# Altium PCB demo_board.PcbDoc (part 1 of 2)
Units mm, origin at the board's own origin, x right, y up, seen from the top; angles counter-clockwise.
Board outline 152.4 x 101.6 mm, 4 copper layers (L1, L2, L3, L4), stack 1.641 mm thick; 94 components, 72 nets, 715 pads, 204 vias.
Unrouted connection lines stored in the file: 201.
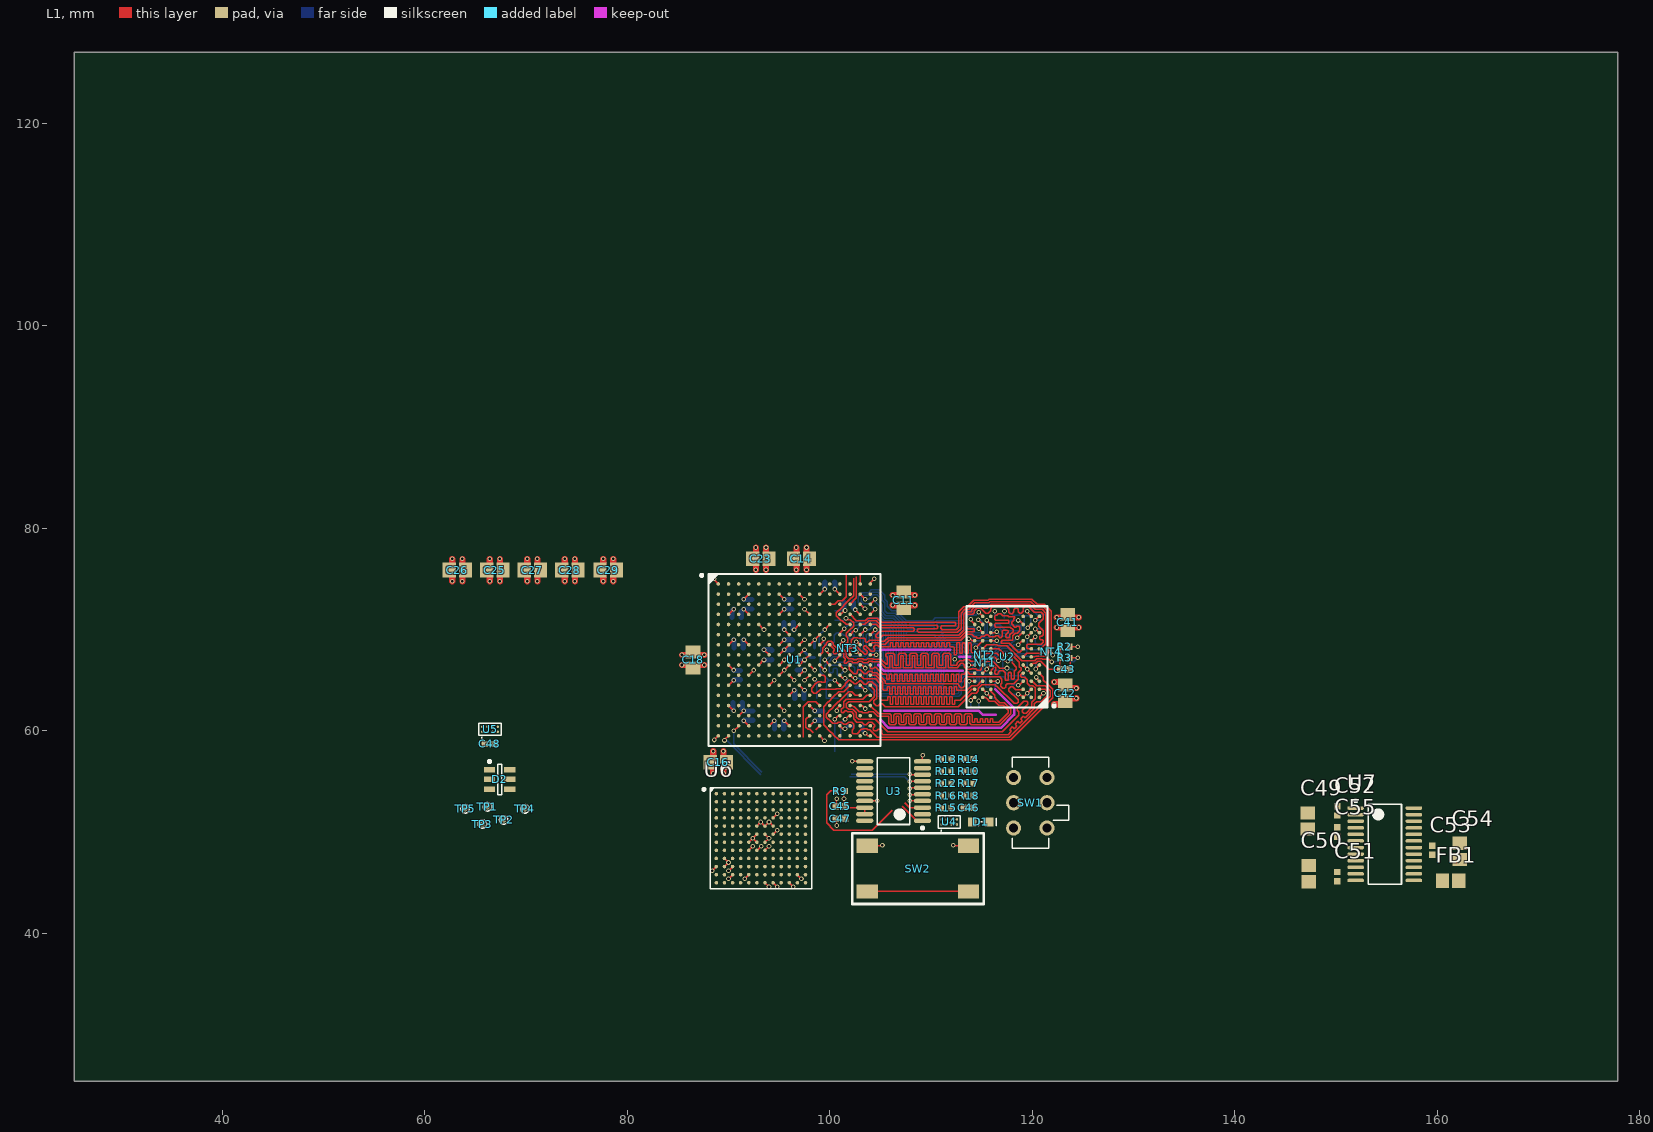
[diagram p0: L1 view]
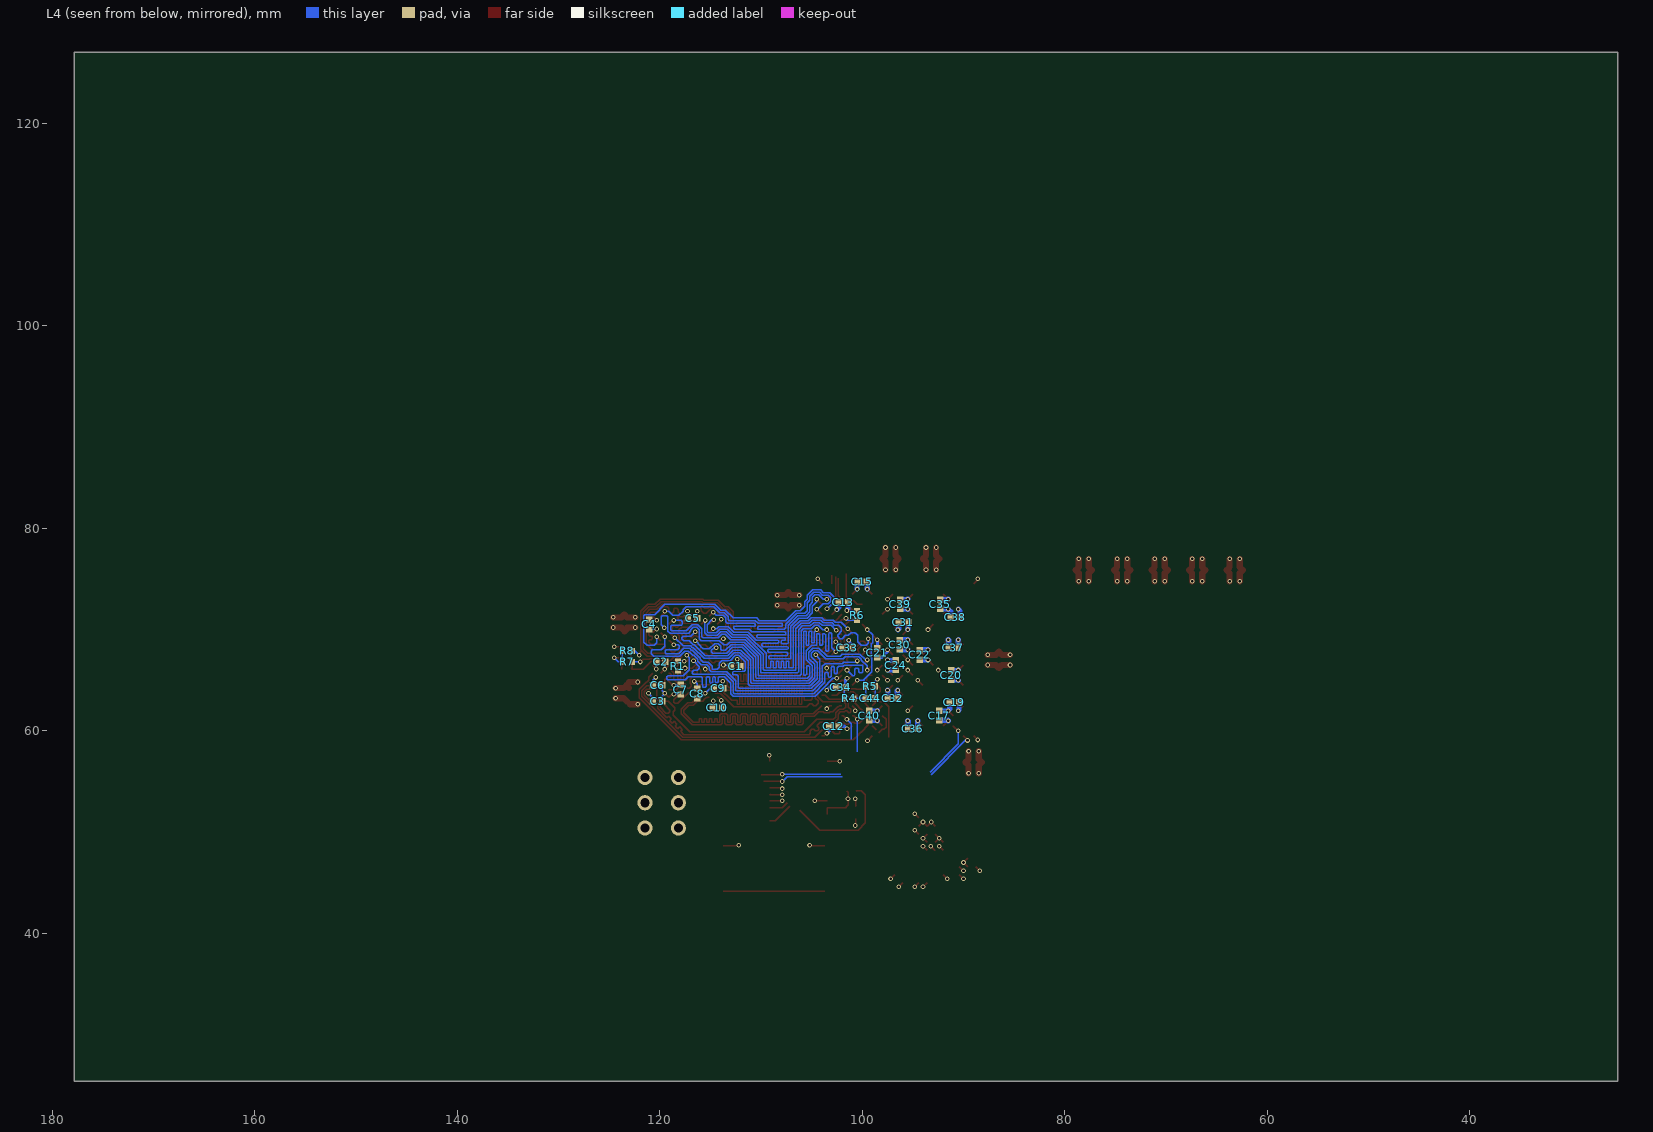
[diagram p1: L4 view, seen from below]
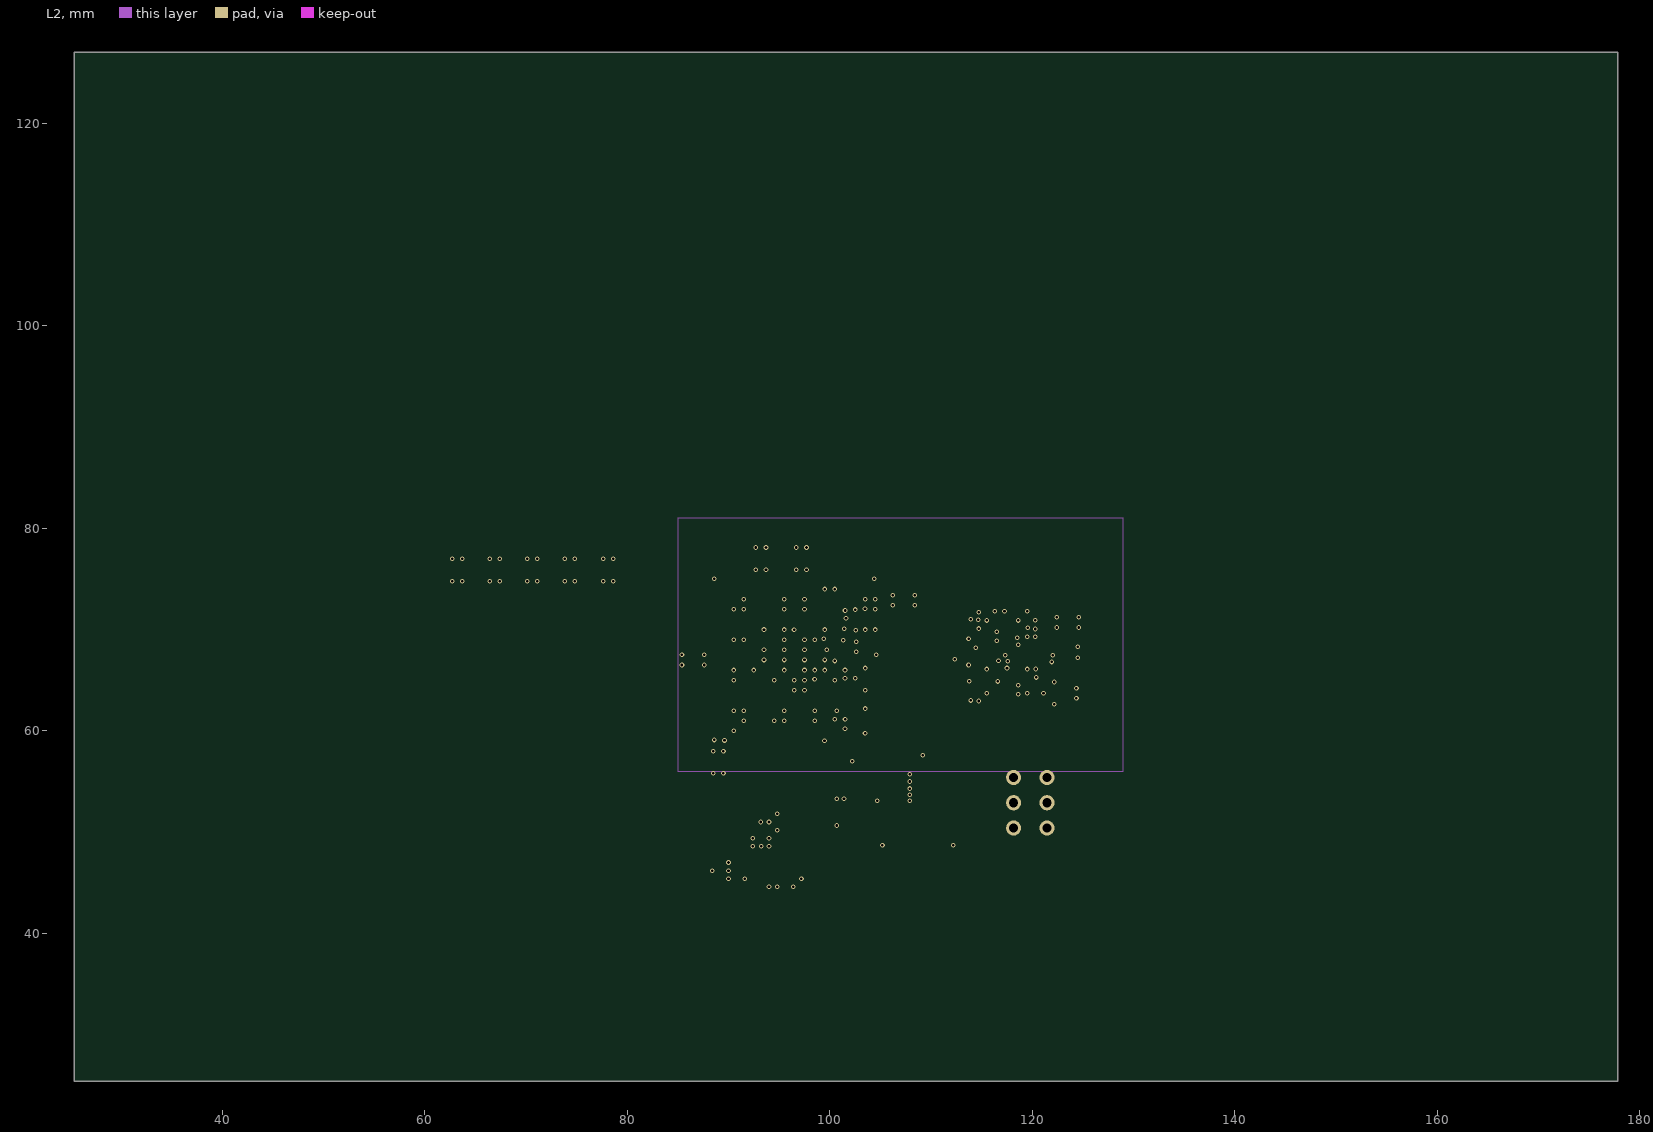
[diagram p2: L2]
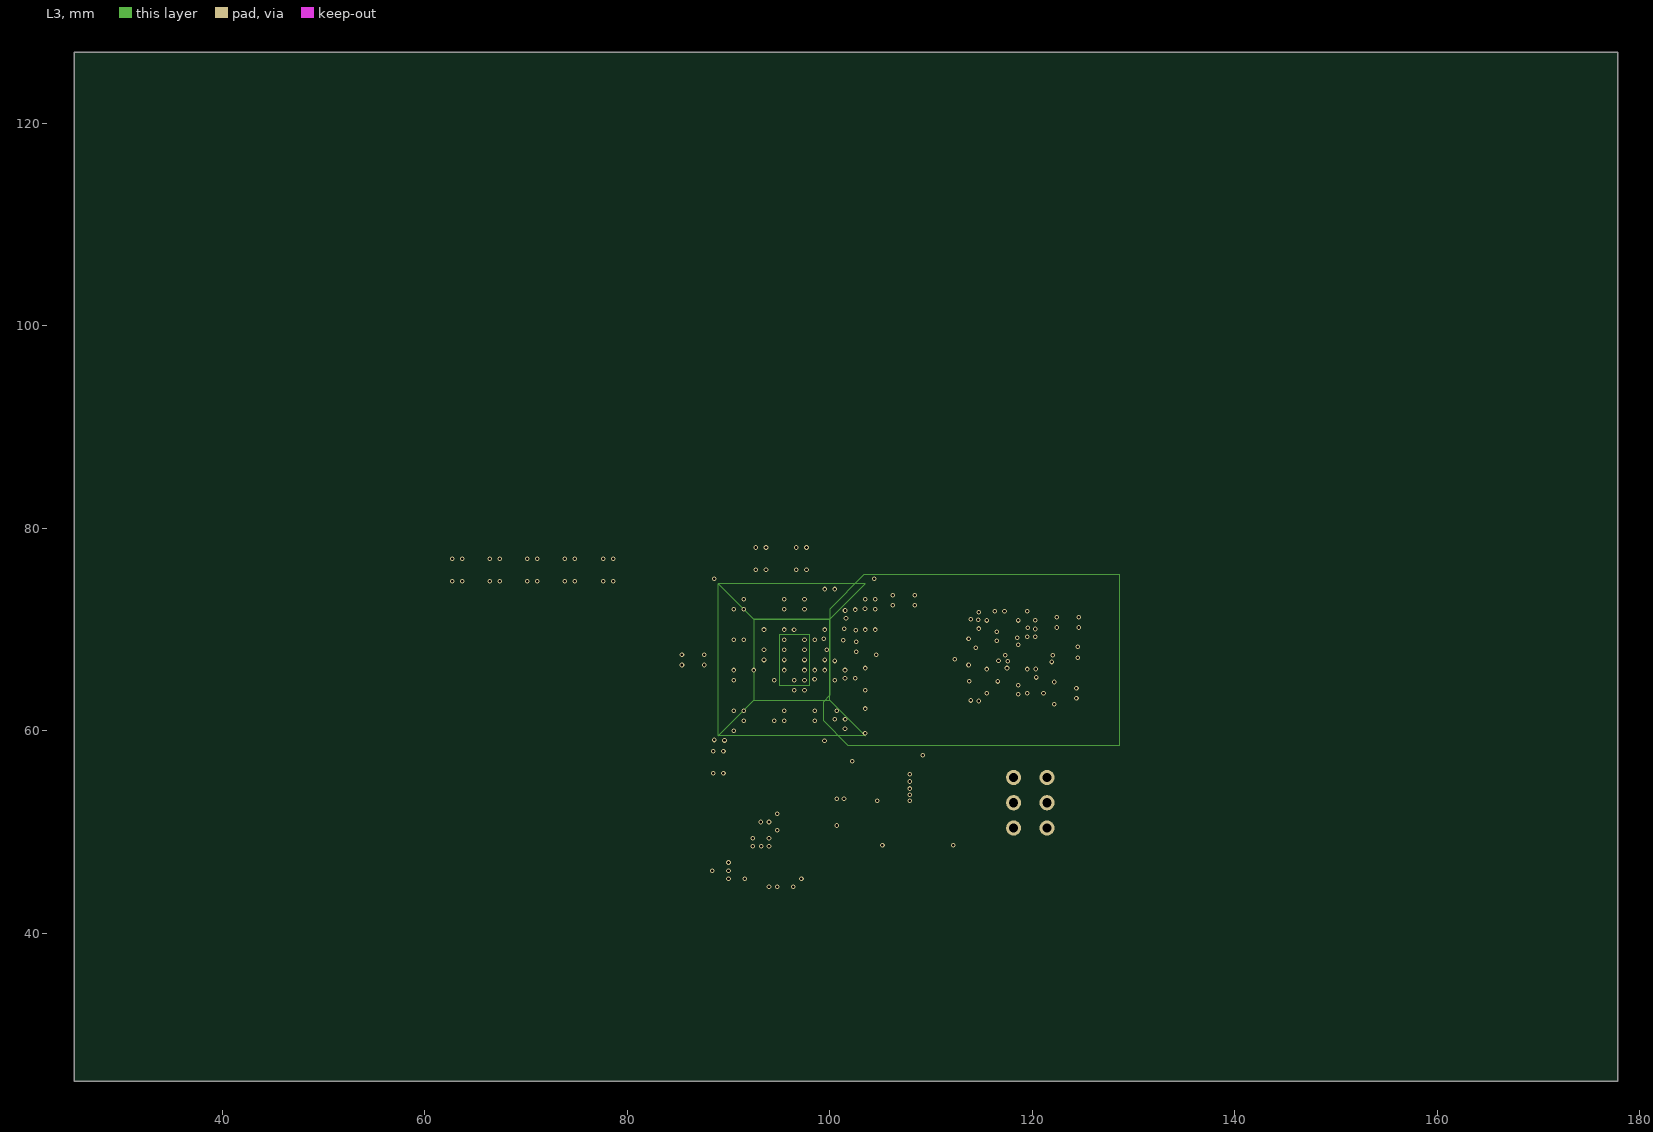
[diagram p3: L3]

## Layer stack, top to bottom
L1: signal copper 0.0356
Dielectric: prepreg 0.1702, FR-408, Dk 3.66
L2: signal copper 0.0178
Dielectric: core 1.1938, FR-408, Dk 3.66
L3: signal copper 0.0178
Dielectric: prepreg 0.1702, FR-408, Dk 3.66
L4: signal copper 0.0356

## Board outline
25.4,25.4 177.8,25.4 177.8,127 25.4,127

## Design rules (kind name [scope] priority, off if disabled: settings)
Clearance [All] p1: gap=0.127
DiffPairsRouting [All] p1: maxlimit=0.254 minlimit=0.127 mostfreqgap=0.127 maxuncoupledlength=12.7
HoleSize [All] p1: absolutevalues=TRUE maxlimit=2.54 minlimit=0.254 maxpercent=80.000 minpercent=20.000
Length DDRT [(InNetClass('DDR_D') OR InNetClass('DDR_O'))] p1: maxlimit=32.639 minlimit=32.385
Length DDRB [(InNetClass('DDR_A') OR InNetClass('DDR_O_B'))] p2: maxlimit=29.464 minlimit=29.21
MinimumAnnularRing [All] p1: minimumring=0.102
PlaneClearance [All] p1: clearance=0.254
PlaneConnect PlaneConnect_via [IsVia] p1: planeconnectstyle=Direct reliefexpansion=0.508 reliefentries=4 reliefconductorwidth=0.254 reliefairgap=0.254
PlaneConnect [All] p2: planeconnectstyle=Relief reliefexpansion=0.508 reliefentries=4 reliefconductorwidth=0.254 reliefairgap=0.254
PolygonConnect PolygonConnect_via [All vs IsVia] p1: connectstyle=Direct reliefconductorwidth=0.254 reliefentries=4 polygonreliefangle="90 Angle"
PolygonConnect [All] p2: connectstyle=Relief reliefconductorwidth=0.254 reliefentries=4 polygonreliefangle="90 Angle"
RoutingVias [All] p1: holewidth=0.254 width=0.813 viastyle="Through Hole" minholewidth=0.254 minwidth=0.457 maxholewidth=1.27 maxwidth=2.54
SilkscreenOverComponentPads SilkToSolderMaskClearance [IsPad] p1: minsilkscreentomaskgap=0.152
SolderMaskExpansion [All] p1: expansion=0.102
Width [All] p1: maxlimit=2.54 minlimit=0.127 preferedwidth=0.508
23 further rules are at their usual default settings.

## Classes and differential pairs
component class Power: C21 C22 C23 C24 C25 C26 C27 C28 C29 C30 C31 C32
component class Bank3: C18 C19 C20 C37 C38
component class Bank2_Configuration: C16 C17 C36 C40 C45 C46 C47 C48 D1 D2 R9 R10 R11 R12 R13 R14 R15 R16 R17 R18 SW1 SW2 TP1 TP2 TP3 TP4 TP5 U3 U4 U5
component class Bank1_DDR: C1 C2 C3 C4 C5 C6 C7 C8 C9 C10 C11 C12 C13 C33 C34 C41 C42 C43 C44 NT1 NT2 NT3 NT4 R1 R2 R3 R4 R5 R6 R7 R8 U2
component class Bank0: C14 C15 C35 C39 U1
component class Processor: U6
net class JTAG: TCK TCK_IN TDI_1 TDI_2 TDO TMS TMS_IN
net class FPGA_Conf: FPGA_CCLK FPGA_DIN FPGA_DONE FPGA_INIT_B FPGA_PROG_B P_FPGA_CCLK P_FPGA_DIN
net class DDR_O_B: CAS# RAS#
net class DDR_A: A0 A1 A2 A3 A4 A5 A6 A7 A8 A9 A10 A11 A12 A13
net class DDR_D: DQ0 DQ1 DQ2 DQ3 DQ4 DQ5 DQ6 DQ7
net class DDR_O: BA0 BA1 BA2 CK_N CK_P CKE DM/RDQS DQS_N DQS_P NetU2_A2 ODT WE#
net class Power: +3V3 GND MVDD VAUX VDD0 VDD3 VDDCORE VINT
component class ADC_channel: C49 C50 C51 C52 C53 C54 C55 FB1 U7
differential pair DQS: +DQS_P -DQS_N
differential pair CK: +CK_P -CK_N

## Components (designator, comment, footprint, x,y, rotation, side; value= is the part's Value field where it differs from the comment)
C1 "220n/6V3" C0402_N 112.5,66.375 r0 bottom
C2 "220n/6V3" C0402_N 119.9,66.8 r0 bottom
C3 "220n/6V3" C0402_N 120.2,62.9 r0 bottom
C4 "220n/6V3" C0402_N 121.05,70.5 r90 bottom
C5 "220n/6V3" C0402_N 116.75,71.1 r180 bottom
C6 "220n/6V3" C0402_N 120.2,64.5 r0 bottom
C7 "220n/6V3" C0402_N 117.9,64.075 r90 bottom
C8 "220n/6V3" C0402_N 116.275,63.675 r90 bottom
C9 "220n/6V3" C0402_N 114.2,64.2 r180 bottom
C10 "220n/6V3" C0402_N 114.3,62.3 r180 bottom
C11 "4u7/6V3" C0805_N 107.3,72.9 r270 top
C12 "220n/6V3" C0402_N 102.794,60.452 r180 bottom
C13 "220n/6V3" C0402_N 101.85,72.7 r0 bottom
C14 "4u7/6V3" C0805_N 97.2,77 r0 top
C15 "220n/6V3" C0402_N 100,74.7 r0 bottom
C16 "4u7/6V3" C0805_N 89,56.9 r0 top
C17 "220n/6V3" C0402_N 92.4,61.5 r270 bottom
C18 "4u7/6V3" C0805_N 86.5,67 r90 top
C19 "220n/6V3" C0402_N 90.9,62.8 r180 bottom
C20 "220n/6V3" C0402_N 91.2,65.5 r90 bottom
C21 "220n/6V3" C0402_N 98.5,67.7 r90 bottom
C22 "220n/6V3" C0402_N 94.3,67.5 r90 bottom
C23 "4u7/6V3" C0805_N 93.2,77 r0 top
C24 "220n/6V3" C0402_N 96.7,66.5 r90 bottom
C25 "4u7/6V3" C0805_N 66.925,75.875 r0 top
C26 "4u7/6V3" C0805_N 63.225,75.875 r0 top
C27 "4u7/6V3" C0805_N 70.625,75.875 r0 top
C28 "4u7/6V3" C0805_N 74.325,75.875 r0 top
C29 "4u7/6V3" C0805_N 78.125,75.875 r0 top
C30 "220n/6V3" C0402_N 96.3,68.5 r90 bottom
C31 "220n/6V3" C0402_N 95.936,70.714 r180 bottom
C32 "220n/6V3" C0402_N 97,63.2 r0 bottom
C33 "220n/6V3" C0402_N 101.473,68.224 r180 bottom
C34 "220n/6V3" C0402_N 102.1,64.3 r180 bottom
C35 "220n/6V3" C0402_N 92.3,72.5 r90 bottom
C36 "220n/6V3" C0402_N 95,60.2 r0 bottom
C37 "220n/6V3" C0402_N 91,68.2 r0 bottom
C38 "220n/6V3" C0402_N 90.8,71.2 r180 bottom
C39 "220n/6V3" C0402_N 96.241,72.492 r270 bottom
C40 "220n/6V3" C0402_N 99.3,61.5 r90 bottom
C41 "4u7/6V3" C0805_N 123.5,70.7 r270 top
C42 "4u7/6V3" C0805_N 123.254,63.722 r90 top
C43 "220n/6V3" C0402_N 123.2,66.1 r180 top
C44 "220n/6V3" C0402_N 99.2,63.2 r0 bottom
C45 "220n/6V3" C0402_N 101.05,52.55 r0 top
C46 "220n/6V3" C0402_N 113.7,52.4 r180 top
C47 "220n/6V3" C0402_N 101.05,51.3 r0 top
C48 "220n/6V3" C0402_N 66.4,58.7 r180 top
C49 "4u7/6V3" C0805_N 147.2,51.1 r90 top
C50 "4u7/6V3" C0805_N 147.3,45.9 r270 top
C51 "220n/6V3" C0402_N 150.1,45.6 r270 top
C52 "220n/6V3" C0402_N 150.1,52.1 r90 top
C53 "220n/6V3" C0402_N 159.5,48.2 r90 top
C54 "4u7/6V3" C0805_N 162.2,48.1 r90 top
C55 "220n/6V3" C0402_N 150.1,50 r90 top
D1 "Conf" LED0603_RED_N 114.9,51 r0 top
D2 "WE 82402305" SOT23-6_N 67.4,55.2 r0 top
FB1 "HZ0805B222R-10" L0805_N 161.3,45.2 r180 top
NT1 "NET TIE" NET_TIE_5MIL_2 115.341,66.726 r225 top net-tie
NT2 "NET TIE" NET_TIE_5MIL_2 115.3,67.5 r225 top net-tie
NT3 "NET TIE" NET_TIE_5MIL_2 101.75,68.175 r315 top net-tie
NT4 "NET TIE" NET_TIE_5MIL_2 121.875,67.8 r135 top net-tie
R1 "100R" R0402_N 118.2,66.4 r90 bottom
R2 "4k7 1%" R0402_N 123.2,68.3 r180 top
R3 "4k7 1%" R0402_N 123.2,67.2 r0 top
R4 "4k7 1%" R0402_N 101.3,63.2 r180 bottom
R5 "4k7 1%" R0402_N 99.2,64.4 r180 bottom
R6 "4k7 1%" R0402_N 100.5,71.4 r90 bottom
R7 "100R" R0402_N 123.2,66.8 r0 bottom
R8 "4k7 1%" R0402_N 123.2,67.9 r0 bottom
R9 "4k7 1%" R0402_N 101.05,54.05 r180 top
R10 "330R" R0402_N 113.7,56 r180 top
R11 "4k7 1%" R0402_N 111.5,56 r180 top
R12 "4k7 1%" R0402_N 111.5,54.8 r180 top
R13 "330R" R0402_N 111.5,57.2 r180 top
R14 "4k7 1%" R0402_N 113.7,57.2 r0 top
R15 "100R 1%" R0402_N 111.5,52.4 r180 top
R16 "100R 1%" R0402_N 111.5,53.6 r0 top
R17 "4k7 1%" R0402_N 113.7,54.8 r0 top
R18 "0R" R0402_N 113.7,53.6 r0 top
SW1 "Conf_Mode" JS202011AQN 119.8,52.9 r90 top
SW2 "SW 4,3mm 1,5N SMD" SW4,3SMD 108.7,46.4 r180 top
TP1 "TCK" TP_20MIL_SMT 66.2,52.5 r90 top
TP2 "TMS" TP_20MIL_SMT 67.8,51.2 r90 top
TP3 "TDI" TP_20MIL_SMT 65.7,50.8 r90 top
TP4 "TDO" TP_20MIL_SMT 69.9,52.3 r90 top
TP5 "GND" TP_20MIL_SMT 64,52.3 r90 top
U1 "XC6SLX16-2FTG256C" XILINX_FT256_L 96.5,67 r0 top locked
U2 "AS4C128M8D2-25BCN" ALLIANCE_FBGA60 117.5,67.3 r180 top locked
U3 "XCF04SVOG20C" XILINX_TSOP20_N 106.3,54.05 r180 top
U4 "SN74LVC2G125YZPR" TI_YZP8 111.8,51 r90 top
U5 "SN74LVC2G125YZPR" TI_YZP8 66.45,60.15 r90 top
U6 "ATSAM3X8EA-CU" Atmel_LFBGA144_M 93.2,49.4 r0 top
U7 "ADC08200CIMT" National_TSSOP24_N 154.8,48.8 r0 top

## Footprints (in the part's own frame and the unit in brackets; to place one, negate y for a bottom-side part, rotate by r counter-clockwise, add the part's x,y. Pads: shape width x height; smd on the part's side, far side on the other; paste and mask are expansions set on the pad)
ALLIANCE_FBGA60 [mm] "BGA, 60-Leads, Body 8.00x10.00mmx1.20mm, Pitch 0.80mm"
  round 0.36 smd: A1(-3.2,4) A2(-2.4,4) A3(-1.6,4) A7(1.6,4) A8(2.4,4) A9(3.2,4) B1(-3.2,3.2) B2(-2.4,3.2) B3(-1.6,3.2) B7(1.6,3.2) B8(2.4,3.2) B9(3.2,3.2) C1(-3.2,2.4) C2(-2.4,2.4) C3(-1.6,2.4) C7(1.6,2.4) C8(2.4,2.4) C9(3.2,2.4) D1(-3.2,1.6) D2(-2.4,1.6) D3(-1.6,1.6) D7(1.6,1.6) D8(2.4,1.6) D9(3.2,1.6) E1(-3.2,0.8) E2(-2.4,0.8) E3(-1.6,0.8) E7(1.6,0.8) E8(2.4,0.8) E9(3.2,0.8) F2(-2.4,0) F3(-1.6,0) F7(1.6,0) F8(2.4,0) F9(3.2,0) G1(-3.2,-0.8) G2(-2.4,-0.8) G3(-1.6,-0.8) G7(1.6,-0.8) G8(2.4,-0.8) H2(-2.4,-1.6) H3(-1.6,-1.6) H7(1.6,-1.6) H8(2.4,-1.6) H9(3.2,-1.6) J1(-3.2,-2.4) J2(-2.4,-2.4) J3(-1.6,-2.4) J7(1.6,-2.4) J8(2.4,-2.4) K2(-2.4,-3.2) K3(-1.6,-3.2) K7(1.6,-3.2) K8(2.4,-3.2) K9(3.2,-3.2) L1(-3.2,-4) L2(-2.4,-4) L3(-1.6,-4) L7(1.6,-4) L8(2.4,-4)
  silkscreen extent -4.78,-5 4,5, body extent -4,-5 4,5, height 1.2
Atmel_LFBGA144_M [mm] "BGA, 144-Leads, Body 10.0x10.0mm,  Pitch 0.80mm"
  round 0.35 smd: A1(-4.4,4.4) A2(-3.6,4.4) A3(-2.8,4.4) A4(-2,4.4) A5(-1.2,4.4) A6(-0.4,4.4) A7(0.4,4.4) A8(1.2,4.4) A9(2,4.4) A10(2.8,4.4) A11(3.6,4.4) A12(4.4,4.4) B1(-4.4,3.6) B2(-3.6,3.6) B3(-2.8,3.6) B4(-2,3.6) B5(-1.2,3.6) B6(-0.4,3.6) B7(0.4,3.6) B8(1.2,3.6) B9(2,3.6) B10(2.8,3.6) B11(3.6,3.6) B12(4.4,3.6) C1(-4.4,2.8) C2(-3.6,2.8) C3(-2.8,2.8) C4(-2,2.8) C5(-1.2,2.8) C6(-0.4,2.8) C7(0.4,2.8) C8(1.2,2.8) C9(2,2.8) C10(2.8,2.8) C11(3.6,2.8) C12(4.4,2.8) D1(-4.4,2) D2(-3.6,2) D3(-2.8,2) D4(-2,2) D5(-1.2,2) D6(-0.4,2) D7(0.4,2) D8(1.2,2) D9(2,2) D10(2.8,2) D11(3.6,2) D12(4.4,2) E1(-4.4,1.2) E2(-3.6,1.2) E3(-2.8,1.2) E4(-2,1.2) E5(-1.2,1.2) E6(-0.4,1.2) E7(0.4,1.2) E8(1.2,1.2) E9(2,1.2) E10(2.8,1.2) E11(3.6,1.2) E12(4.4,1.2) F1(-4.4,0.4) F2(-3.6,0.4) F3(-2.8,0.4) F4(-2,0.4) F5(-1.2,0.4) F6(-0.4,0.4) F7(0.4,0.4) F8(1.2,0.4) F9(2,0.4) F10(2.8,0.4) F11(3.6,0.4) F12(4.4,0.4) G1(-4.4,-0.4) G2(-3.6,-0.4) G3(-2.8,-0.4) G4(-2,-0.4) G5(-1.2,-0.4) G6(-0.4,-0.4) G7(0.4,-0.4) G8(1.2,-0.4) G9(2,-0.4) G10(2.8,-0.4) G11(3.6,-0.4) G12(4.4,-0.4) H1(-4.4,-1.2) H2(-3.6,-1.2) H3(-2.8,-1.2) H4(-2,-1.2) H5(-1.2,-1.2) H6(-0.4,-1.2) H7(0.4,-1.2) H8(1.2,-1.2) H9(2,-1.2) H10(2.8,-1.2) H11(3.6,-1.2) H12(4.4,-1.2) J1(-4.4,-2) J2(-3.6,-2) J3(-2.8,-2) J4(-2,-2) J5(-1.2,-2) J6(-0.4,-2) J7(0.4,-2) J8(1.2,-2) J9(2,-2) J10(2.8,-2) J11(3.6,-2) J12(4.4,-2) K1(-4.4,-2.8) K2(-3.6,-2.8) K3(-2.8,-2.8) K4(-2,-2.8) K5(-1.2,-2.8) K6(-0.4,-2.8) K7(0.4,-2.8) K8(1.2,-2.8) K9(2,-2.8) K10(2.8,-2.8) K11(3.6,-2.8) K12(4.4,-2.8) L1(-4.4,-3.6) L2(-3.6,-3.6) L3(-2.8,-3.6) L4(-2,-3.6) L5(-1.2,-3.6) L6(-0.4,-3.6) L7(0.4,-3.6) L8(1.2,-3.6) L9(2,-3.6) L10(2.8,-3.6) L11(3.6,-3.6) L12(4.4,-3.6) M1(-4.4,-4.4) M2(-3.6,-4.4) M3(-2.8,-4.4) M4(-2,-4.4) M5(-1.2,-4.4) M6(-0.4,-4.4) M7(0.4,-4.4) M8(1.2,-4.4) M9(2,-4.4) M10(2.8,-4.4) M11(3.6,-4.4) M12(4.4,-4.4)
  silkscreen extent -5.75,-5 5,5, body extent -5,-5 5,5, height 1.4
C0402_N [mm] "Chip Capacitor, 2-Leads, Body 1.00x0.50mm, IPC Medium Density"
  rect 0.64x0.64 smd: 1(-0.46,0) 2(0.46,0)
  body extent -0.55,-0.3 0.55,0.3, height 0.6
C0805_N [mm] "Chip Capacitor, 2-Leads, Body 2.00x1.25mm, IPC Medium Density"
  rect 1.3x1.45 smd: 1(-0.8,0) 2(0.8,0)
  body extent -1.1,-0.72 1.1,0.72, height 1.1
JS202011AQN [mm]
  round 1.5 hole 0.9: COM1(0,-1.65) COM2(0,1.65) NC1(-2.5,-1.65) NC2(-2.5,1.65) NO1(2.5,-1.65) NO2(2.5,1.65)
  silkscreen extent -4.5,-3.8 4.5,1.8, body extent -4.5,-3.8 4.5,1.8, height 3.5
L0805_N [mm] "Chip Inductor, 2-Leads, Body 2.00x1.25mm, IPC Medium Density"
  rect 1.3x1.45 smd: 1(-0.8,0) 2(0.8,0)
  body extent -1.1,-0.72 1.1,0.72, height 1.1
LED0603_RED_N [mm] "LED Red Body 1.6x0.8mm, IPC Medium Density"
  rect 0.85x0.9 smd: 1(-0.825,0) 2(0.825,0)
  silkscreen extent -0.18,-0.37 1.53,0.37, body extent -0.85,-0.45 0.85,0.45, height 1.1
National_TSSOP24_N [mm] "TSOP, 24-Leads, Body 7.9x4.5mm (max), Pitch 0.65mm, IPC Medium Density"
  oval 1.65x0.35 smd: 1(-2.875,3.575) 2(-2.875,2.925) 3(-2.875,2.275) 4(-2.875,1.625) 5(-2.875,0.975) 6(-2.875,0.325) 7(-2.875,-0.325) 8(-2.875,-0.975) 9(-2.875,-1.625) 10(-2.875,-2.275) 11(-2.875,-2.925) 12(-2.875,-3.575) 13(2.875,-3.575) 14(2.875,-2.925) 15(2.875,-2.275) 16(2.875,-1.625) 17(2.875,-0.975) 18(2.875,-0.325) 19(2.875,0.325) 20(2.875,0.975) 21(2.875,1.625) 22(2.875,2.275) 23(2.875,2.925) 24(2.875,3.575)
  silkscreen extent -3,-3.95 1.65,4.42, body extent -2.25,-3.95 2.25,3.95, height 1.1
NET_TIE_5MIL_2 [mil] "5mil net tie with 2 pins"
  rect 5x5 smd paste-10 mask-10: 1(-5,0) 2(5,0)
  L1 lines w5: 5,0 -5,0
R0402_N [mm] "Chip Resistor, 2-Leads, Body 1.05x0.54mm, IPC Medium Density"
  rect 0.55x0.6 smd: 1(-0.475,0) 2(0.475,0)
  body extent -0.55,-0.3 0.55,0.3, height 0.4
SOT23-6_N [mm] "SOT23, 6-Leads, Body 3.0x2.6mm (max), Pitch 0.95mm, IPC Medium Density"
  rect 1.1x0.55 smd: 1(-1,0.95) 2(-1,0) 3(-1,-0.95) 4(1,-0.95) 5(1,0) 6(1,0.95)
  silkscreen extent -1.12,-1.5 0.2,1.9, body extent -1.5,-1.5 1.5,1.5, height 1.3
SW4,3SMD [mm] "Przycisk 4,3mm wysokoœci"
  rect 2.1x1.4 smd: 1(-5,-2.25) 1(5,-2.25) 2(-5,2.25) 2(5,2.25)
  silkscreen extent -6.5,-3.5 6.5,3.5, body extent -3,-3 3,3, height 4.3
TI_YZP8 [mm] "BGA, 8-Leads, Body 1.9x0.9mm,  Pitch 0.50mm"
  rrect20% 0.3x0.3 on Top Paste: 0(-0.25,0.75) 0(-0.25,-0.25) 0(-0.25,0.25) 0(-0.25,-0.75) 0(0.25,0.75) 0(0.25,-0.25) 0(0.25,0.25) 0(0.25,-0.75)
  round 0.25 smd paste-5 mask+0.06: A1(-0.25,0.75) A2(0.25,0.75) B1(-0.25,0.25) B2(0.25,0.25) C1(-0.25,-0.25) C2(0.25,-0.25) D1(-0.25,-0.75) D2(0.25,-0.75)
  silkscreen extent -0.9,-1.1 0.6,1.1, body extent -0.45,-0.95 0.45,0.95, height 0.5
TP_20MIL_SMT [mil] "20mil SMT testpoint"
  round 20 smd paste-196.85: 1(0,0)
  silkscreen extent -17,-17 17,17
XILINX_FT256_L [mm] "BGA, 256-Leads, Body 17.00x17.00mmx1.55mm, Pitch 1.00mm, 0.35mm pads"
  round 0.35 smd: A1(-7.5,7.5) A2(-6.5,7.5) A3(-5.5,7.5) A4(-4.5,7.5) A5(-3.5,7.5) A6(-2.5,7.5) A7(-1.5,7.5) A8(-0.5,7.5) A9(0.5,7.5) A10(1.5,7.5) A11(2.5,7.5) A12(3.5,7.5) A13(4.5,7.5) A14(5.5,7.5) A15(6.5,7.5) A16(7.5,7.5) B1(-7.5,6.5) B2(-6.5,6.5) B3(-5.5,6.5) B4(-4.5,6.5) B5(-3.5,6.5) B6(-2.5,6.5) B7(-1.5,6.5) B8(-0.5,6.5) B9(0.5,6.5) B10(1.5,6.5) B11(2.5,6.5) B12(3.5,6.5) B13(4.5,6.5) B14(5.5,6.5) B15(6.5,6.5) B16(7.5,6.5) C1(-7.5,5.5) C2(-6.5,5.5) C3(-5.5,5.5) C4(-4.5,5.5) C5(-3.5,5.5) C6(-2.5,5.5) C7(-1.5,5.5) C8(-0.5,5.5) C9(0.5,5.5) C10(1.5,5.5) C11(2.5,5.5) C12(3.5,5.5) C13(4.5,5.5) C14(5.5,5.5) C15(6.5,5.5) C16(7.5,5.5) D1(-7.5,4.5) D2(-6.5,4.5) D3(-5.5,4.5) D4(-4.5,4.5) D5(-3.5,4.5) D6(-2.5,4.5) D7(-1.5,4.5) D8(-0.5,4.5) D9(0.5,4.5) D10(1.5,4.5) D11(2.5,4.5) D12(3.5,4.5) D13(4.5,4.5) D14(5.5,4.5) D15(6.5,4.5) D16(7.5,4.5) E1(-7.5,3.5) E2(-6.5,3.5) E3(-5.5,3.5) E4(-4.5,3.5) E5(-3.5,3.5) E6(-2.5,3.5) E7(-1.5,3.5) E8(-0.5,3.5) E9(0.5,3.5) E10(1.5,3.5) E11(2.5,3.5) E12(3.5,3.5) E13(4.5,3.5) E14(5.5,3.5) E15(6.5,3.5) E16(7.5,3.5) F1(-7.5,2.5) F2(-6.5,2.5) F3(-5.5,2.5) F4(-4.5,2.5) F5(-3.5,2.5) F6(-2.5,2.5) F7(-1.5,2.5) F8(-0.5,2.5) F9(0.5,2.5) F10(1.5,2.5) F11(2.5,2.5) F12(3.5,2.5) F13(4.5,2.5) F14(5.5,2.5) F15(6.5,2.5) F16(7.5,2.5) G1(-7.5,1.5) G2(-6.5,1.5) G3(-5.5,1.5) G4(-4.5,1.5) G5(-3.5,1.5) G6(-2.5,1.5) G7(-1.5,1.5) G8(-0.5,1.5) G9(0.5,1.5) G10(1.5,1.5) G11(2.5,1.5) G12(3.5,1.5) G13(4.5,1.5) G14(5.5,1.5) G15(6.5,1.5) G16(7.5,1.5) H1(-7.5,0.5) H2(-6.5,0.5) H3(-5.5,0.5) H4(-4.5,0.5) H5(-3.5,0.5) H6(-2.5,0.5) H7(-1.5,0.5) H8(-0.5,0.5) H9(0.5,0.5) H10(1.5,0.5) H11(2.5,0.5) H12(3.5,0.5) H13(4.5,0.5) H14(5.5,0.5) H15(6.5,0.5) H16(7.5,0.5) J1(-7.5,-0.5) J2(-6.5,-0.5) J3(-5.5,-0.5) J4(-4.5,-0.5) J5(-3.5,-0.5) J6(-2.5,-0.5) J7(-1.5,-0.5) J8(-0.5,-0.5) J9(0.5,-0.5) J10(1.5,-0.5) J11(2.5,-0.5) J12(3.5,-0.5) J13(4.5,-0.5) J14(5.5,-0.5) J15(6.5,-0.5) J16(7.5,-0.5) K1(-7.5,-1.5) K2(-6.5,-1.5) K3(-5.5,-1.5) K4(-4.5,-1.5) K5(-3.5,-1.5) K6(-2.5,-1.5) K7(-1.5,-1.5) K8(-0.5,-1.5) K9(0.5,-1.5) K10(1.5,-1.5) K11(2.5,-1.5) K12(3.5,-1.5) K13(4.5,-1.5) K14(5.5,-1.5) K15(6.5,-1.5) K16(7.5,-1.5) L1(-7.5,-2.5) L2(-6.5,-2.5) L3(-5.5,-2.5) L4(-4.5,-2.5) L5(-3.5,-2.5) L6(-2.5,-2.5) L7(-1.5,-2.5) L8(-0.5,-2.5) L9(0.5,-2.5) L10(1.5,-2.5) L11(2.5,-2.5) L12(3.5,-2.5) L13(4.5,-2.5) L14(5.5,-2.5) L15(6.5,-2.5) L16(7.5,-2.5) M1(-7.5,-3.5) M2(-6.5,-3.5) M3(-5.5,-3.5) M4(-4.5,-3.5) M5(-3.5,-3.5) M6(-2.5,-3.5) M7(-1.5,-3.5) M8(-0.5,-3.5) M9(0.5,-3.5) M10(1.5,-3.5) M11(2.5,-3.5) M12(3.5,-3.5) M13(4.5,-3.5) M14(5.5,-3.5) M15(6.5,-3.5) M16(7.5,-3.5) N1(-7.5,-4.5) N2(-6.5,-4.5) N3(-5.5,-4.5) N4(-4.5,-4.5) N5(-3.5,-4.5) N6(-2.5,-4.5) N7(-1.5,-4.5) N8(-0.5,-4.5) N9(0.5,-4.5) N10(1.5,-4.5) N11(2.5,-4.5) N12(3.5,-4.5) N13(4.5,-4.5) N14(5.5,-4.5) N15(6.5,-4.5) N16(7.5,-4.5) P1(-7.5,-5.5) P2(-6.5,-5.5) P3(-5.5,-5.5) P4(-4.5,-5.5) P5(-3.5,-5.5) P6(-2.5,-5.5) P7(-1.5,-5.5) P8(-0.5,-5.5) P9(0.5,-5.5) P10(1.5,-5.5) P11(2.5,-5.5) P12(3.5,-5.5) P13(4.5,-5.5) P14(5.5,-5.5) P15(6.5,-5.5) P16(7.5,-5.5) R1(-7.5,-6.5) R2(-6.5,-6.5) R3(-5.5,-6.5) R4(-4.5,-6.5) R5(-3.5,-6.5) R6(-2.5,-6.5) R7(-1.5,-6.5) R8(-0.5,-6.5) R9(0.5,-6.5) R10(1.5,-6.5) R11(2.5,-6.5) R12(3.5,-6.5) R13(4.5,-6.5) R14(5.5,-6.5) R15(6.5,-6.5) R16(7.5,-6.5) T1(-7.5,-7.5) T2(-6.5,-7.5) T3(-5.5,-7.5) T4(-4.5,-7.5) T5(-3.5,-7.5) T6(-2.5,-7.5) T7(-1.5,-7.5) T8(-0.5,-7.5) T9(0.5,-7.5) T10(1.5,-7.5) T11(2.5,-7.5) T12(3.5,-7.5) T13(4.5,-7.5) T14(5.5,-7.5) T15(6.5,-7.5) T16(7.5,-7.5)
  silkscreen extent -9.27,-8.5 8.5,8.5, body extent -8.5,-8.5 8.5,8.5, height 1.55
XILINX_TSOP20_N [mm] "TSOP, 20-Leads, Body 6.6x4.5mm (max), Pitch 0.65mm, IPC Medium Density"
  oval 1.7x0.45 smd: 1(-2.85,2.925) 2(-2.85,2.275) 3(-2.85,1.625) 4(-2.85,0.975) 5(-2.85,0.325) 6(-2.85,-0.325) 7(-2.85,-0.975) 8(-2.85,-1.625) 9(-2.85,-2.275) 10(-2.85,-2.925) 11(2.85,-2.925) 12(2.85,-2.275) 13(2.85,-1.625) 14(2.85,-0.975) 15(2.85,-0.325) 16(2.85,0.325) 17(2.85,0.975) 18(2.85,1.625) 19(2.85,2.275) 20(2.85,2.925)
  silkscreen extent -2.98,-3.3 1.6,3.77, body extent -3.27,-3.3 3.28,3.3, height 1.2

## Part data
C1 C2 C3 C4 C5 C6 C7 C8 C9 C10 C11 C12 C13 C14 C15 C16 C17 C18 C19 C20 C21 C22 C23 C24 C25 C26 C27 C28 C29 C30 C31 C32 C33 C34 C35 C36 C37 C38 C39 C40 C41 C42 C43 C44 C45 C46 C47 C48 C49 C50 C51 C52 C53 C54 C55: library part C
D1: library part LED_0603_Red_Super_Bright, "Generic 0603 Super Bright Red LED"
D2: "TVS Diode WE-TVS-Standard, VRWM=5.0V"
FB1: "Ferrite Bead, 0805, 2200R@100MHz, 0.8R@DC, 200mA max."
R1 R2 R3 R4 R5 R6 R7 R8 R9 R10 R11 R12 R13 R14 R15 R16 R17 R18: library part R
SW1: library part JS202011AQN
SW2: "Microswitch 4,3mm"
TP1 TP2 TP3 TP4 TP5: library part TP
U3: "Xilinx Platform Flash configuration memory 4Mbit"

## Via types
v1: diameter 0.457, hole 0.254, L1 to L4, 204 vias

## Nets (pads, with @x,y where several pads share a name; then routed paths per layer and width w, separated by ;. In a path a pad name is that pad's centre, name@x,y a point inside that pad or via, vN(x,y) a via of type N, cw(c..) or ccw(c..) an arc to the next point about the centre after c; other vN are vias at no path point)
+3V3: C16.2 C17.2 C36.2 C40.2 C45.2 C46.2 R9.1 R11.1 R12.1 R13.1 R15.1 R17.1 U1.N7 U1.N10 U1.R4 U1.R8 U1.T11 U3.18 U3.19 U4.A2 U6.D8 U6.F8 U6.H5 U6.H7 U6.L3 U6.L11 U6.M8 | length 16.6
  L1 w0.127: v1(90,45.4) U6.L3@90.4,45.8 ; v1(91.5,61) U1.R4@92,60.5 ; U6.H5@92,48.2 v1(92.4,48.6) ; U6.H7@93.6,48.2 v1(94,48.6) ; U6.M8@94.4,45 v1(94.8,44.6) ; U6.F8@94.4,49.8 v1(94.8,50.2) ; U6.D8@94.4,51.4 v1(94.8,51.8) ; U1.N7@95,62.5 v1(95.5,62) ; v1(95.5,61) U1.R8@96,60.5 ; U6.L11@96.8,45.8 v1(97.2,45.4) ; U1.N10@98,62.5 v1(98.5,62) ; U1.T11@99,59.5 v1(99.475,59.025) ; v1@101.375,53.175 101.375,52.685 C45.2@101.51,52.55 101.635,52.425 U3.18@103.45,52.425 U3.19@103.45,51.775 ; v1(101.4,53.3) 101.4,53.925 R9.1@101.525,54.05
  L1 w0.61: v1(89.5,55.8) 89.5,56.6 C16.2@89.8,56.9 89.5,57.2 v1(89.5,58)
  L4 w0.508: v1(91.5,61) 91.54,61.04 C17.2@92.4,61.04 ; C36.2@95.46,60.2 95.46,60.96 v1(95.5,61) ; v1(98.5,62) 98.54,61.96 C40.2@99.3,61.96
+3VA: C49.2 C50.2 C51.2 C52.2 C55.2 FB1.2 U7.1 U7.4 U7.12
A0: U1.H15 U2.H8 | length 29.4
  L1 w0.127: v1(102.595,67.795) 102.595,67.896 102.6,67.9 U1.H15@103,67.5 ; v1(114.4,68.2) U2.H8@115.1,68.9
  L4 w0.127: v1(102.595,67.795) 103.014,68.214 103.014,69.564 103.125,69.675 103.232,69.675 103.325,69.582 103.325,67.975 103.425,67.875 103.52,67.875 103.62,67.975 103.62,69.495 103.725,69.6 103.85,69.6 103.9,69.55 103.9,68.525 103.998,68.427 104.125,68.427 104.2,68.502 104.2,69.5 104.275,69.575 104.425,69.575 104.475,69.525 104.475,68.502 104.55,68.427 104.984,68.427 105.527,67.884 105.527,67.027 104.945,66.445 104.945,65.333 105.329,64.949 110.666,64.949 110.768,65.05 110.768,67.136 111.866,68.234 112.845,68.234 113.396,67.683 114.758,67.683 114.9,67.825 114.9,67.933 114.633,68.2 v1(114.4,68.2)
A1: U1.H16 U2.H3 | length 29.3
  L1 w0.127: U1.H16@104,67.5 v1(104.6,67.5) ; v1(118.6,68.5) 119,68.9 U2.H3@119.1,68.9
  L4 w0.127: v1(104.6,67.5) 104.183,67.083 104.183,65.017 105.013,64.187 112.125,64.187 112.238,64.3 112.238,65.033 112.25,65.045 112.25,65.425 ; 112.275,65.425 112.373,65.523 112.727,65.523 112.8,65.595 112.8,65.8 112.736,65.864 111.641,65.864 111.53,65.976 111.53,66.82 112.182,67.472 112.529,67.472 112.775,67.227 112.775,67.15 113.005,66.919 113.875,66.919 114.119,66.675 114.119,66.287 114.325,66.081 114.795,66.081 114.827,66.113 114.827,66.379 115.221,66.773 115.673,66.773 115.983,67.083 115.983,67.182 116.774,67.973 116.884,67.973 117.05,68.139 117.597,68.139 118.132,67.604 119.329,67.604 119.425,67.7 119.425,67.9 119.325,68 118.2,68 118.05,68.15 118.05,68.4 118.15,68.5 v1(118.6,68.5)
A2: U1.F16 U2.H7 | length 29.4
  L1 w0.127: U1.F16@104,69.5 v1(104.5,70) ; U2.H7@115.9,68.9 v1(116.5,68.9)
  L4 w0.127: v1(104.5,70) 104.75,69.75 104.75,68.732 104.8,68.681 104.952,68.681 105.004,68.732 105.004,69.795 105.054,69.846 105.156,69.846 105.258,69.744 105.258,68.512 105.325,68.445 105.478,68.445 105.512,68.478 105.512,69.795 105.562,69.846 105.719,69.846 105.781,69.784 105.781,65.531 105.725,65.475 105.6,65.475 105.486,65.589 105.486,66.414 105.45,66.45 105.309,66.45 105.199,66.34 105.199,65.438 105.434,65.203 110.45,65.203 110.514,65.266 110.514,67.241 111.761,68.488 112.95,68.488 113.501,67.937 113.862,67.937 113.981,68.056 113.981,68.373 114.226,68.619 114.573,68.619 115.111,68.081 115.674,68.081 115.919,68.326 115.919,68.359 116.46,68.9 v1(116.5,68.9)
A3: U1.H13 U2.J2 | length 29.4
  L1 w0.127: v1(100.5,66.9) 101,67.4 U1.H13@101,67.5 ; v1(119.5,69.3) U2.J2@119.9,69.7
  L4 w0.127: v1(100.5,66.9) 100.641,66.759 101.841,66.759 101.981,66.619 103.673,66.619 103.929,66.363 103.929,64.882 104.878,63.933 112.492,63.933 112.492,64.928 113.391,65.827 114.9,65.827 115.081,66.008 115.081,66.274 115.326,66.519 115.881,66.519 116.237,66.875 116.237,67.077 116.635,67.475 116.745,67.475 117.048,67.777 117.062,67.777 117.157,67.872 117.505,67.872 117.75,67.627 117.75,67.6 118,67.35 120.6,67.35 120.85,67.6 120.85,67.869 120.723,67.996 119.863,67.996 119.5,68.358 v1(119.5,69.3)
A4: U1.C16 U2.J8 | length 29.3
  L1 w0.127: U1.C16@104,72.5 v1(104.5,73) ; v1(114.7,70.1) U2.J8@115.1,69.7
  L4 w0.127: v1(104.5,73) 104.5,72.741 104.919,72.322 104.919,71.637 105.44,71.116 106.245,71.116 107.051,70.31 107.051,67.158 107.1,67.108 109.118,67.108 109.244,67.234 109.244,67.337 109.144,67.437 107.391,67.437 107.34,67.488 107.34,67.64 107.442,67.742 109.218,67.742 109.322,67.845 109.322,67.945 109.22,68.047 107.391,68.047 107.315,68.123 107.315,68.25 107.391,68.326 109.803,68.326 109.93,68.453 109.93,68.556 109.83,68.656 108.331,68.656 108.255,68.732 108.255,68.885 108.331,68.961 110.438,68.961 111.235,69.758 112.688,69.758 113.211,70.281 114.189,70.281 114.37,70.1 v1(114.7,70.1)
A5: U1.J11 U2.J3 | length 29.3
  L1 w0.127: U1.J11@99,66.5 v1(99.5,66) ; v1(118.5,69.2) 119,69.7 U2.J3@119.1,69.7
  L4 w0.127: v1(99.5,66) 99.5,66.407 100.081,66.988 100.081,67.074 100.326,67.319 101.674,67.319 101.871,67.122 103.577,67.122 104.374,67.919 104.773,67.919 105.019,67.673 105.019,67.326 104.437,66.744 104.437,65.122 105.118,64.441 111.125,64.441 111.276,64.591 111.276,66.925 112.077,67.726 112.634,67.726 113.188,67.173 113.98,67.173 113.982,67.175 115.617,67.175 116.668,68.227 116.779,68.227 116.945,68.393 117.684,68.393 118.491,69.2 v1(118.5,69.2) v1@118.529,69.2
A6: U1.J12 U2.J7 | length 29.4
  L1 w0.127: v1(99.5,67) U1.J12@100,66.5 ; U2.J7@115.9,69.7 116.5,69.7 v1(116.5,69.8)
  L4 w0.127: v1(99.5,67) 99.648,67 100.221,67.573 101.952,67.573 102.149,67.376 103.472,67.376 104.269,68.173 104.879,68.173 105.273,67.779 105.273,67.132 104.691,66.55 104.691,65.227 105.223,64.695 110.9,64.695 111.022,64.816 111.022,67.03 111.971,67.98 112.739,67.98 113.291,67.429 115.511,67.429 116.563,68.481 116.674,68.481 117.1,68.907 117.632,68.907 117.8,69.075 117.8,69.2 117.65,69.35 116.95,69.35 v1(116.5,69.8)
A7: U1.F15 U2.K2 | length 29.2
  L1 w0.127: U1.F15@103,69.5 v1(103.5,70) ; v1(119.55,70.175) 119.875,70.5 U2.K2@119.9,70.5
  L4 w0.127: v1(103.5,70) 103.907,70 104.326,70.419 104.7,70.419 105,70.119 105,70.1 105.824,70.1 106.035,69.889 106.035,65.583 106.161,65.457 110.21,65.457 110.26,65.507 110.26,67.346 111.656,68.742 113.055,68.742 113.314,68.483 113.676,68.483 114.112,68.919 115.326,68.919 115.909,68.919 116.081,69.091 116.081,69.973 116.326,70.219 116.673,70.219 116.919,69.973 116.919,69.874 117.146,69.647 118.974,69.647 119.177,69.85 119.177,71.272 119.285,71.381 119.754,71.381 119.862,71.273 119.862,70.484 119.553,70.175 v1(119.55,70.175)
A8: U1.F13 U2.K8 | length 29.3
  L1 w0.127: U1.F13@101,69.5 101,69.648 v1(101.43,70.078) ; v1(114.671,70.971) 115.1,70.543 U2.K8@115.1,70.5
  L4 w0.127: v1(101.43,70.078) 102.063,70.712 102.655,70.712 102.87,70.927 103.757,70.927 104.011,71.181 105.016,71.181 105.335,70.862 106.14,70.862 106.797,70.205 106.797,66.28 106.858,66.219 107.239,66.219 107.239,66.854 107.493,66.854 107.493,66.219 107.747,66.219 107.747,66.854 108.001,66.854 108.001,66.219 108.255,66.219 108.255,66.854 108.509,66.854 108.509,66.219 108.763,66.219 108.763,66.854 109.017,66.854 109.017,66.219 109.448,66.219 109.498,66.269 109.498,67.662 111.34,69.504 112.793,69.504 113.316,70.027 114.084,70.027 114.43,69.681 115.011,69.681 115.22,69.681 115.316,69.777 115.316,70.491 114.836,70.971 v1(114.671,70.971)
A9: U1.F14 U2.K3 | length 29.3
  L1 w0.127: U1.F14@102,69.5 102.428,69.928 v1(102.555,69.928) ; v1(118.6,70.9) 118.7,70.9 U2.K3@119.1,70.5
  L4 w0.127: v1(102.555,69.928) 102.59,69.928 103.081,70.419 103.967,70.419 104.221,70.673 104.805,70.673 105.124,70.354 105.929,70.354 106.289,69.994 106.289,65.811 106.389,65.711 109.957,65.711 110.006,65.76 110.006,67.451 111.551,68.996 113.004,68.996 113.526,69.519 113.874,69.519 114.22,69.173 115.221,69.173 115.706,69.173 115.827,69.294 115.827,70.079 116.221,70.473 116.789,70.473 117.361,69.901 118.821,69.901 118.923,70.002 118.923,70.307 118.796,70.434 117.831,70.434 117.754,70.51 117.754,70.79 117.865,70.9 v1(118.6,70.9)
A10: U1.C15 U2.H2 | length 29.3
  L1 w0.127: U1.C15@103,72.5 103.45,72.05 v1(103.475,72.05) ; U2.H2@119.9,68.9 v1(120.3,69.3)
  L4 w0.127: v1(103.475,72.05) 103.448,72.05 102.821,72.678 102.821,72.974 102.832,72.986 102.832,73.257 103.226,73.652 103.823,73.652 104.098,73.927 104.891,73.927 105.427,73.391 105.427,73.005 105.689,72.743 105.689,72.311 106.122,71.878 106.56,71.878 107.547,70.891 110.178,70.891 110.432,71.145 112.734,71.145 113.516,71.927 113.975,71.927 114.546,72.498 119.475,72.498 120.503,71.471 121.449,71.471 121.561,71.359 121.561,68.761 121.228,68.428 120.548,68.428 120.3,68.676 v1(120.3,69.3)
A11: U1.G11 U2.K7 | length 29.3
  L1 w0.127: U1.G11@99,68.5 99.4,68.9 v1(99.4,69.1) ; v1(115.5,70.9) U2.K7@115.9,70.5
  L4 w0.127: v1(99.4,69.1) 99.4,68.628 99.6,68.428 100.076,68.428 100.432,68.783 100.432,69.432 100.656,69.656 100.674,69.656 100.718,69.7 101.1,69.7 101.381,69.419 101.675,69.419 101.981,69.113 102.21,69.113 102.413,69.317 102.413,69.495 102.398,69.509 102.381,69.509 102.081,69.81 102.081,70.181 102.337,70.437 102.739,70.437 102.976,70.673 103.862,70.673 104.116,70.927 104.91,70.927 105.23,70.608 106.034,70.608 106.543,70.1 106.543,66.04 106.618,65.965 109.652,65.965 109.752,66.065 109.752,67.556 111.445,69.25 112.898,69.25 113.421,69.773 113.979,69.773 114.325,69.427 115.116,69.427 ; 115.116,69.427 115.325,69.427 115.57,69.672 115.57,70.83 v1(115.5,70.9)
A12: U1.D16 U2.L2 | length 29.3
  L1 w0.127: U1.D16@104,71.5 v1(104.5,72) ; v1(119.5,71.8) 119.5,71.7 U2.L2@119.9,71.3
  L4 w0.127: v1(104.5,72) 104.4,72 103.844,72.556 103.335,72.556 103.086,72.805 103.086,73.152 103.331,73.398 103.928,73.398 104.203,73.673 104.786,73.673 105.173,73.286 105.173,72.9 105.435,72.638 105.435,71.839 105.65,71.624 106.455,71.624 107.569,70.51 107.569,70.18 107.721,70.028 110.287,70.028 110.338,70.079 110.338,70.227 110.232,70.333 107.925,70.333 107.874,70.383 107.874,70.587 107.925,70.637 110.283,70.637 110.537,70.891 113.125,70.891 113.227,70.993 113.227,71.279 113.621,71.673 114.08,71.673 114.651,72.244 117.399,72.244 117.669,71.974 117.669,71.831 118.1,71.4 118.7,71.4 119.1,71.8 v1(119.5,71.8)
A13: U1.B15 U2.L8 | length 29.2
  L1 w0.127: U1.B15@103,73.5 103.505,72.995 v1(103.505,72.979) ; v1(114.7,71.7) U2.L8@115.1,71.3
  L4 w0.127: v1(103.505,72.979) 103.861,72.979 103.865,72.975 104.309,73.419 104.681,73.419 104.919,73.181 104.919,72.681 105.181,72.419 105.181,71.734 105.545,71.37 106.35,71.37 107.305,70.415 107.305,68.666 107.391,68.58 107.899,68.58 108.001,68.682 108.001,68.859 107.925,68.936 107.671,68.936 107.594,69.012 107.594,69.164 107.645,69.215 110.332,69.215 110.411,69.294 110.411,69.395 110.312,69.494 107.62,69.494 107.569,69.545 107.569,69.698 107.645,69.774 110.891,69.774 111.13,70.012 112.583,70.012 112.7,70.129 112.7,70.256 112.624,70.333 110.592,70.333 110.541,70.383 110.541,70.536 110.642,70.637 113.329,70.637 113.481,70.79 113.481,71.174 113.726,71.419 114.419,71.419 v1(114.7,71.7)
BA0: U1.G14 U2.G2 | length 32.5
  L1 w0.127: U1.G14@102,68.5 102.103,68.603 102.103,68.94 102.377,69.214 102.769,69.214 102.849,69.134 103.416,69.134 103.5,69.05 103.5,68.8 103.575,68.725 103.708,68.725 103.941,68.958 104.948,68.958 105.08,68.826 105.391,68.826 105.77,69.204 112.845,69.204 113.414,69.773 114.223,69.773 114.281,69.831 114.281,70.044 114.225,70.1 113.6,70.1 113.481,70.219 113.481,71.4 113.581,71.5 114.125,71.5 114.281,71.656 114.281,71.874 114.526,72.119 114.881,72.119 115.375,71.625 115.65,71.625 115.881,71.856 115.881,72.075 116.05,72.244 117.406,72.244 117.669,71.981 117.669,71.706 117.8,71.575 118,71.575 118.175,71.75 118.175,71.975 118.325,72.125 118.5,72.125 118.625,72 118.625,71.775 118.776,71.624 118.901,71.624 119.081,71.805 119.081,72.081 119.244,72.244 119.648,72.244 120.192,71.7 120.897,71.7 121.07,71.527 121.07,71.07 120.625,70.625 120.625,70.325 120.825,70.125 121.07,69.88 121.07,69.475 120.925,69.33 120.78,69.33 120.719,69.269 120.719,69.081 120.8,69 120.975,69 121.075,68.9 121.075,68.725 120.9,68.55 120.25,68.55 120.23,68.53 119.53,68.53 119.47,68.47 119.47,68.18 119.55,68.1 U2.G2@119.9,68.1
BA1: U1.G16 U2.G3 | length 32.6
  L1 w0.127: U1.G16@104,68.5 104.204,68.704 104.843,68.704 104.975,68.572 105.496,68.572 105.875,68.95 112.95,68.95 113.519,69.519 114.025,69.519 114.26,69.284 114.44,69.284 114.574,69.149 114.826,69.149 115.006,69.33 115.253,69.33 115.424,69.5 115.576,69.5 115.806,69.271 116.278,69.271 116.388,69.381 116.612,69.381 116.793,69.2 116.9,69.2 117.025,69.325 117.025,69.838 117.138,69.95 117.525,69.95 117.6,69.875 117.6,69.725 117.375,69.5 117.375,69.3 117.475,69.2 117.675,69.2 117.775,69.3 117.775,69.475 118.1,69.8 118.1,69.975 117.825,70.25 116.375,70.25 116.27,70.355 116.27,70.545 116.35,70.625 117.625,70.625 117.675,70.675 117.675,70.875 117.625,70.925 116.375,70.925 116.275,71.025 116.275,71.325 116.35,71.4 116.468,71.4 116.643,71.575 116.875,71.575 117.069,71.381 117.569,71.381 117.675,71.275 118.2,71.275 118.25,71.225 118.25,71.143 118.181,71.074 118.181,70.931 117.95,70.7 117.95,70.55 118.25,70.25 118.375,70.25 118.45,70.325 118.675,70.325 118.775,70.225 118.775,69.9 118.494,69.619 118.326,69.619 118.081,69.373 118.081,68.981 118.025,68.925 117.025,68.925 116.919,68.819 116.919,68.706 116.971,68.654 117.735,68.654 118.614,67.775 118.775,67.775 U2.G3@119.1,68.1
BA2: U1.E16 U2.G1 | length 32.5
  L1 w0.127: U1.E16@104,70.5 104.593,70.5 104.919,70.174 108.25,70.174 108.35,70.074 108.35,69.925 108.25,69.825 104.921,69.825 104.919,69.826 104.725,69.632 104.725,69.625 104.525,69.425 104.525,69.325 104.537,69.325 104.65,69.212 104.987,69.212 105.233,69.458 112.74,69.458 113.227,69.945 113.227,71.527 113.454,71.754 114,71.754 114.027,71.781 114.027,71.979 114.421,72.373 114.986,72.373 115.256,72.103 115.55,72.103 115.945,72.498 119.753,72.498 120.27,71.982 120.975,71.982 121.342,71.615 121.342,68.59 120.852,68.1 U2.G1@120.7,68.1
CAS#: U1.K14 U2.G7 | length 29.4
  L1 w0.127: U1.K14@102,65.5 102.3,65.2 v1(102.5,65.2) ; U2.G7@115.9,68.1 116.684,68.1 v1(117.331,67.453)
  L4 w0.127: v1(102.5,65.2) 102.893,65.2 103.919,64.174 103.919,64.131 104.625,63.425 112.75,63.425 113,63.675 113,64.718 113.601,65.319 114.1,65.319 114.194,65.225 114.194,64.825 114.294,64.725 114.4,64.725 114.5,64.825 114.5,65.225 114.594,65.319 114.706,65.319 114.775,65.25 114.775,64.8 114.864,64.711 115.011,64.711 115.075,64.775 115.075,65.25 115.144,65.319 115.281,65.319 115.375,65.225 115.375,64.425 115.475,64.325 115.714,64.325 115.764,64.375 115.764,64.544 115.775,64.555 115.775,65.225 115.869,65.319 117.181,65.319 117.45,65.05 119.2,65.05 119.275,65.125 119.275,65.35 119.166,65.459 117.648,65.459 117.075,66.032 117.075,67.197 v1(117.331,67.453)
CK_N: NT2.2 U1.H11 U2.F8 | length 32.5
  L1 w0.127: U1.H11@99,67.5 99.281,67.781 99.281,68.174 99.635,68.527 99.635,68.651 99.849,68.865 100.151,68.865 100.366,68.651 100.366,68.494 100.725,68.134 101.242,68.134 101.634,67.742 101.634,67.349 101.864,67.119 102.257,67.119 102.376,67 102.624,67 102.743,67.119 103.257,67.119 103.368,67.008 103.41,67.008 103.418,67 103.624,67 103.743,67.119 104.257,67.119 104.295,67.081 105.027,67.081 105.558,66.55 105.675,66.55 105.675,67.275 105.625,67.325 105.624,67.325 105.537,67.412 105.537,67.539 105.658,67.659 106.28,67.659 106.429,67.51 106.429,66.496 106.775,66.496 106.775,67.5 ; 106.77,67.505 106.924,67.659 107.38,67.659 107.529,67.51 107.529,66.496 107.875,66.496 107.875,67.505 ; 107.87,67.51 108.024,67.664 108.48,67.664 108.629,67.516 108.629,66.496 108.975,66.496 108.975,67.51 ; 108.97,67.516 109.124,67.67 109.58,67.67 109.729,67.521 109.729,66.496 110.075,66.496 110.075,67.516 ; 110.07,67.521 110.224,67.675 110.68,67.675 110.829,67.526 110.829,66.496 111.175,66.496 111.175,67.521 ; 111.17,67.526 111.324,67.68 111.78,67.68 111.929,67.531 111.929,66.496 112.475,66.496 112.6,66.621 112.6,66.7 112.819,66.919 113.194,66.919 113.275,67 113.793,67 113.922,66.871 114.453,66.871 114.599,66.725 114.8,66.725 115.1,67.025 U2.F8@115.1,67.3 NT2.2@115.21,67.41